# Altium PCB SL1 Xilinx Spartan-IIE PQ208 Rev1.02.PcbDoc (part 1 of 2)
Units mm, origin at the board's own origin, x right, y up, seen from the top; angles counter-clockwise.
Board outline 180.01 x 50.51 mm, 2 copper layers (Top Layer, Bottom Layer), stack 1.646 mm thick; 115 components, 126 nets, 642 pads, 225 vias.
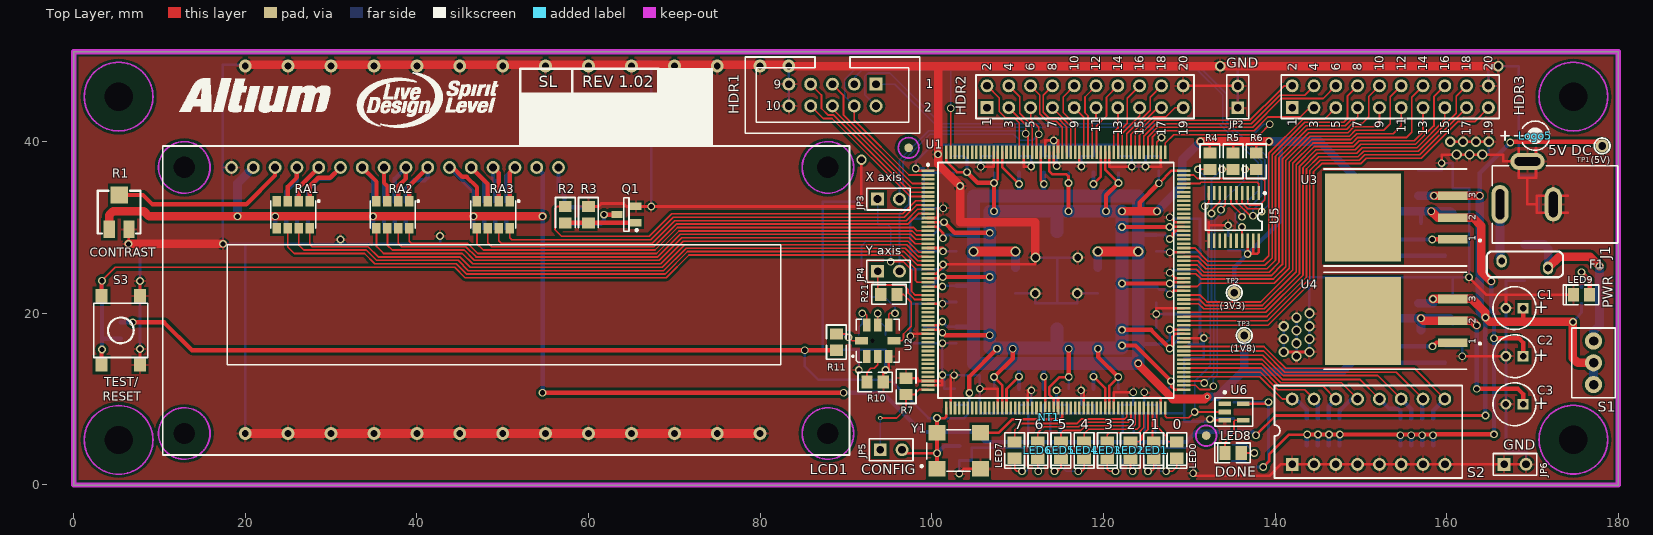
[diagram p0: Top Layer view]
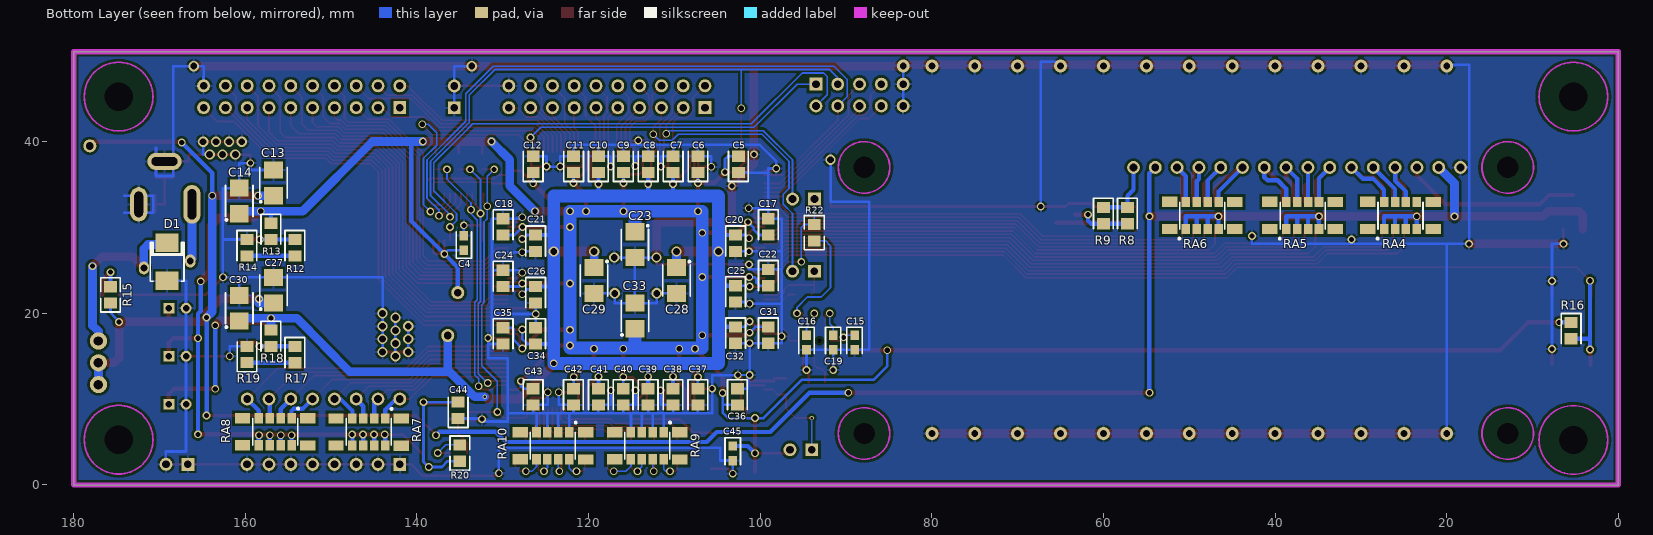
[diagram p1: Bottom Layer view, seen from below]

## Layer stack, top to bottom
Top Solder: solder mask 0.0102, Solder Resist, Dk 3.5
Top Layer: signal copper 0.0356
Dielectric1: core 1.5748, FR-4, Dk 4.8
Bottom Layer: signal copper 0.0356
Bottom Solder: solder mask 0.0102, Solder Resist, Dk 3.5

## Board outline
0,-0.005 cw(c0,0) -0.005,0 -0.005,50.5 cw(c0,50.5) 0,50.505 180,50.505 cw(c180,50.5) 180.005,50.5 180.005,0 cw(c180,0) 180,-0.005

## Design rules (kind name [scope] priority, off if disabled: settings)
Clearance "Clearance_Power Polygon" [inpolygon and innetclass('Power')] p1: gap=0.3 ignorepadtopadclearanceinfootprint=FALSE except(0: Arc-Hole Track-Hole SMDPad-Hole THPad-Hole Via-Hole Fill-Hole Poly-Hole Region-Hole Text-Hole)
Clearance [All] p2: gap=0.2 ignorepadtopadclearanceinfootprint=FALSE except(0: Arc-Hole Track-Hole SMDPad-Hole THPad-Hole Via-Hole Fill-Hole Poly-Hole Region-Hole Text-Hole) // General
ComponentClearance ComponentClearance_D1_F1 [InComponent('D1') vs InComponent('F1')] p1 off: gap=0.03 collisioncheckmode=3 verticalgap=0.254 showdistances=FALSE
ComponentClearance ComponentClearance_JP4_R21 [InComponent('JP4') vs InComponent('R21')] p2 off: gap=0.07 collisioncheckmode=3 verticalgap=0.254 showdistances=FALSE
ComponentClearance ComponentClearance_LCD1_U2 [InComponent('LCD1') vs InComponent('U2')] p3 off: gap=0.09 collisioncheckmode=3 verticalgap=0.254 showdistances=FALSE
ComponentClearance ComponentClearance_U1_U6 [InComponent('U1') vs InComponent('U6')] p4 off: gap=0.1 collisioncheckmode=3 verticalgap=0.254 showdistances=FALSE
ComponentClearance ComponentClearance_S2 [InComponent('S2') vs InComponent('RA7') Or InComponent('RA8')] p5 off: gap=0.1 collisioncheckmode=3 verticalgap=0.254 showdistances=FALSE // Why is such a small clearance necessary?
ComponentClearance ComponentClearance_LCD1_R11 [InComponent('LCD1') vs InComponent('R11')] p6 off: gap=0.16 collisioncheckmode=3 verticalgap=0.254 showdistances=FALSE
ComponentClearance ComponentClearance_J1_Logo5 [InComponent('J1') vs InComponent('Logo5')] p7 off: gap=0.19 collisioncheckmode=3 verticalgap=0.254 showdistances=FALSE
ComponentClearance ComponentClearance_R2_R3 [InComponent('R2') vs InComponent('R3')] p8 off: gap=0.19 collisioncheckmode=3 verticalgap=0.254 showdistances=FALSE
ComponentClearance ComponentClearance_R5 [InComponent('R5') vs InComponent('R4') Or InComponent('R6')] p9 off: gap=0.19 collisioncheckmode=3 verticalgap=0.254 showdistances=FALSE
ComponentClearance ComponentClearance_LEDs [HasFootprint('SMD _LED') vs HasFootprint('SMD _LED')] p10 off: gap=0.19 collisioncheckmode=3 verticalgap=0.254 showdistances=FALSE
ComponentClearance ComponentClearance_R7_R10 [InComponent('R7') vs InComponent('R10')] p11 off: gap=0.24 collisioncheckmode=3 verticalgap=0.254 showdistances=FALSE
ComponentClearance ComponentClearance_U1 [InComponent('U1') vs Not InComponent('NT1') && Not InComponent('LED8')] p12 off: gap=0.254 collisioncheckmode=3 verticalgap=0.254 showdistances=FALSE
ComponentClearance ComponentClearance_General [Not InComponent('U1') vs Not InComponent('U1')] p13 off: gap=0.254 collisioncheckmode=3 verticalgap=0.254 showdistances=FALSE
ComponentClearance ComponentClearance_Default [All] p14: gap=0.127 collisioncheckmode=3 verticalgap=0.254 showdistances=FALSE
FabricationTestPointUsage TestPointUsage [All] p1 off: valid=0 allowmultiple=FALSE
FabricationTestpoint Testpoint [All] p1 off: side=3 testpointundercomponent=TRUE minsize=1.016 maxsize=2.54 preferedsize=1.524 minholesize=0 maxholesize=1.016 preferedholesize=0.813 testpointgrid=0.025 allowsidetop=TRUE allowsidebottom=TRUE usegrid=TRUE gridtolerance=0
HoleSize [All] p1: absolutevalues=TRUE maxlimit=3.5 minlimit=0 maxpercent=80.000 minpercent=20.000
PlaneConnect [All] p1: planeconnectstyle=Relief reliefexpansion=0.3 reliefentries=4 reliefconductorwidth=0.2 reliefairgap=0.2
PolygonConnect PolygonConnect_Power [innetclass('Power')] p1: connectstyle=Relief reliefconductorwidth=0.3 reliefentries=4 polygonreliefangle="90 Angle" airgapwidth=0.254
PolygonConnect [All] p2: connectstyle=Relief reliefconductorwidth=0.2 reliefentries=4 polygonreliefangle="90 Angle" airgapwidth=0.254
RoutingVias RoutingVias_Power [innetclass('Power')] p1: holewidth=0.6 width=0.9 viastyle="Through Hole" minholewidth=0.3 minwidth=0.5 maxholewidth=0.8 maxwidth=1.5
RoutingVias [All] p2: holewidth=0.6 width=0.9 viastyle="Through Hole" minholewidth=0.3 minwidth=0.5 maxholewidth=0.6 maxwidth=0.9
SilkToSolderMaskClearance SilkscreenOverComponentPads [IsPad] p1: minsilkscreentomaskgap=0.254 clearancetoexposedcopper=TRUE
SolderMaskExpansion SolderMaskExpansion_Power_Vias [isvia] p1: expansion=0 istentingtop=FALSE
SolderMaskExpansion [All] p2: expansion=0.1 istentingtop=FALSE
Width Width_Power [innetclass('Power') and not inpolygon] p1: maxlimit=2 minlimit=0.3 preferedwidth=0.3
Width [All] p2: maxlimit=2 minlimit=0.2 preferedwidth=0.2
24 further rules are at their usual default settings.

## Classes and differential pairs
component class U_SL_LCD_SW_LED: LCD1 LED0 LED1 LED2 LED3 LED4 LED5 LED6 LED7 Q1 R1 R2 R3 R8 R9 R16 RA1 RA2 RA3 RA4 RA5 RA6 RA7 RA8 RA9 RA10 S2 S3
component class U_SL_FPGA_Auto_2E: U1
component class U_SL_Config: C4 C44 LED8 R4 R5 R6 R20 U5 U6
component class SL_FPGA_Manual_2E: C1 C2 C3 C5 C6 C7 C8 C9 C10 C11 C12 C13 C14 C17 C18 C20 C21 C22 C23 C24 C25 C26 C27 C28 C29 C30 C31 C32 C33 C34 C35 C36 C37 C38 C39 C40 C41 C42 C43 D1 F1 J1 JP2 JP6 LED9 R12 R13 R14 R15 R17 R18 R19 S1 TP1 TP2 TP3 U3 U4
net class SW[7..0]: SW0 SW1 SW2 SW3 SW4 SW5 SW6 SW7
net class LEDS[7..0]: LEDS0 LEDS1 LEDS2 LEDS3 LEDS4 LEDS5 LEDS6 LEDS7
net class LCD_DB[7..0]: LCD_DB0 LCD_DB1 LCD_DB2 LCD_DB3 LCD_DB4 LCD_DB5 LCD_DB6 LCD_DB7
net class Power: 5V GND VCCINT VCCO

## Components (designator, comment, footprint, x,y, rotation, side; value= is the part's Value field where it differs from the comment)
C1 "100uF 16V" CAPPR2-5X6.8 167.9,20.6 r180 top
C2 "100uF 16V" CAPPR2-5X6.8 167.9,15 r180 top
C3 "100uF 16V" CAPPR2-5X6.8 167.9,9.4 r180 top
C4 "10nF" CC1608-0603 134.525,28.2 r90 bottom
C5 "0.1uF" CC2012-0805 102.55,37.35 r90 bottom
C6 "0.1uF" CC2012-0805 107.25,37.35 r90 bottom
C7 "0.1uF" CC2012-0805 110.15,37.35 r90 bottom
C8 "0.1uF" CC2012-0805 113.05,37.35 r90 bottom
C9 "0.1uF" CC2012-0805 115.95,37.35 r90 bottom
C10 "0.1uF" CC2012-0805 118.85,37.35 r90 bottom
C11 "0.1uF" CC2012-0805 121.75,37.35 r90 bottom
C12 "0.1uF" CC2012-0805 126.45,37.35 r90 bottom
C13 "10uF" MCCT-B 156.7,35.2 r90 bottom
C14 "10uF" MCCT-B 160.7,33.1 r90 bottom
C15 "100nF" CC1608-0603 89,16.6 r270 bottom
C16 "100nF" CC1608-0603 94.6,16.6 r270 bottom
C17 "0.1uF" CC2012-0805 99.05,30.075 r270 bottom
C18 "0.1uF" CC2012-0805 129.95,30.075 r270 bottom
C19 "100nF" CC1608-0603 91.5,16.6 r270 bottom
C20 "0.1uF" CC2012-0805 102.85,28.175 r270 bottom
C21 "0.1uF" CC2012-0805 126.15,28.175 r270 bottom
C22 "0.1uF" CC2012-0805 99.05,24.175 r270 bottom
C23 "10uF" MCCT-B 114.6,28 r270 bottom
C24 "0.1uF" CC2012-0805 129.95,24.075 r270 bottom
C25 "0.1uF" CC2012-0805 102.85,22.275 r270 bottom
C26 "0.1uF" CC2012-0805 126.15,22.175 r270 bottom
C27 "10uF" MCCT-B 156.7,22.7 r90 bottom
C28 "10uF" MCCT-B 109.75,23.825 r270 bottom
C29 "10uF" MCCT-B 119.35,23.825 r270 bottom
C30 "10uF" MCCT-B 160.7,20.6 r90 bottom
C31 "0.1uF" CC2012-0805 99.05,17.475 r270 bottom
C32 "0.1uF" CC2012-0805 102.85,17.475 r270 bottom
C33 "10uF" MCCT-B 114.6,19.7 r90 bottom
C34 "0.1uF" CC2012-0805 126.15,17.375 r270 bottom
C35 "0.1uF" CC2012-0805 129.95,17.375 r270 bottom
C36 "0.1uF" CC2012-0805 102.65,10.275 r270 bottom
C37 "0.1uF" CC2012-0805 107.25,10.275 r270 bottom
C38 "0.1uF" CC2012-0805 110.15,10.275 r270 bottom
C39 "0.1uF" CC2012-0805 113.05,10.275 r270 bottom
C40 "0.1uF" CC2012-0805 115.95,10.275 r270 bottom
C41 "0.1uF" CC2012-0805 118.85,10.275 r270 bottom
C42 "0.1uF" CC2012-0805 121.75,10.275 r270 bottom
C43 "0.1uF" CC2012-0805 126.45,10.275 r270 bottom
C44 "0.1uF" CC2012-0805 135.2,8.7 r90 bottom
C45 "10nF" CC1608-0603 103.2,3.7 r270 bottom
D1 "SM6T6V8A" DO214 169.1,25.999 r90 bottom
F1 "Polyswitch, 1.1A" RUE160_0.2 169.1,25.7 r0 top
HDR1 "Header 5X2" HDR2X5_LP 93.5,46.7 r0 top
HDR2 "Header 10X2" HDR2X10 106.44,43.96 r0 top locked
HDR3 "Header 10X2" HDR2X10 142,43.96 r0 top locked
J1 "KLD-0202-B" KLD-0202 179.9,32.7 r180 top
JP2 "GND" HDR1X2 135.65,43.96 r90 top locked
JP3 "X axis" HDR1X2 93.693,33.31 r0 top
JP4 "Y axis" HDR1X2 93.7,24.9 r0 top
JP5 "CONFIG" HDR1X2 94,4.1 r0 top
JP6 "GND" HDR1X2 166.7,2.4 r0 top
LCD1 "162A" 162A 18.4,37 r0 top locked
LED0 "HSMH-C170" "SMD _LED" 128.55,4.075 r90 top
LED1 "HSMH-C170" "SMD _LED" 125.85,4.075 r90 top
LED2 "HSMH-C170" "SMD _LED" 123.15,4.075 r90 top
LED3 "HSMH-C170" "SMD _LED" 120.45,4.075 r90 top
LED4 "HSMH-C170" "SMD _LED" 117.75,4.075 r90 top
LED5 "HSMH-C170" "SMD _LED" 115.05,4.075 r90 top
LED6 "HSMH-C170" "SMD _LED" 112.35,4.075 r90 top
LED7 "HSMH-C170" "SMD _LED" 109.65,4.075 r90 top
LED8 "HSMH-C170" "SMD _LED" 135.1,3.725 r0 top
LED9 "HSMH-C170" "SMD _LED" 175.7,22.15 r0 top
Logo5 "5V" "5V SYMBOL" 170.3,40.7 r0 top
NT1 "GND" NT 113.686,8.174 r270 top net-tie
Q1 "2N7002" SO-G3 64.4,31.5 r90 top
R1 "20K" POT4MM-2 5.3,31.8 r90 top
R2 "560R" CC2012-0805 57.3,31.5 r270 top
R3 "10K" CC2012-0805 60,31.5 r270 top
R4 "4K7" CR2012-0805 132.4,37.725 r270 top
R5 "4K7" CR2012-0805 135.1,37.725 r270 top
R6 "4K7" CR2012-0805 137.8,37.725 r270 top
R7 "1K" CR2012-0805 97,11.5 r270 top
R8 "68R" CC2012-0805 57.2,31.4 r270 bottom
R9 "68R" CC2012-0805 60,31.4 r270 bottom
R10 "680R" CR2012-0805 93.4,12 r180 top
R11 "0R" CR2012-0805 88.88,16.65 r90 top
R12 "100R" CC2012-0805 154.2,27.65 r270 bottom
R13 "120R" CC2012-0805 157,29.55 r270 bottom
R14 "100R" CC2012-0805 159.8,27.65 r270 bottom
R15 "270R" CR2012-0805 175.7,22.15 r270 bottom
R16 "4K7" CC2012-0805 5.5,18 r270 bottom
R17 "47R" CC2012-0805 154.2,15.2 r270 bottom
R18 "120R" CC2012-0805 157,17.1 r270 bottom
R19 "5R6" CC2012-0805 159.8,15.2 r90 bottom
R20 "270R" CR2012-0805 135,3.725 r270 bottom
R21 "100R" CR2012-0805 95,22.2 r0 top
R22 "100R" CR2012-0805 93.7,29.4 r270 bottom
RA1 "270R" MNR34 25.6,31.5 r270 top
RA2 "270R" MNR34 37.2,31.5 r270 top
RA3 "270R" MNR34 48.9,31.5 r270 top
RA4 "4K7" MNR34T 25.4,31.4 r270 bottom
RA5 "4K7" MNR34T 36.8,31.4 r270 bottom
RA6 "4K7" MNR34T 48.5,31.4 r270 bottom
RA7 "4K7" MNR34T 145.605,6.174 r90 bottom
RA8 "4K7" MNR34T 156.5,6.2 r90 bottom
RA9 "270R" MNR34T 113.15,4.575 r90 bottom
RA10 "270R" MNR34T 124.15,4.575 r90 bottom
S1 "TL36WW050" PCB_SWITCH 177.105,11.689 r90 top
S2 "A6ER-8104" DIP-16-KEY 142,2.4 r0 top
S3 "DTSM-61-NR" B3FS_SWITCH 5.5,18 r270 top
TP1 "(5V)" TP 178.1,39.5 r0 top
TP2 "(3V3)" TP 135.233,22.4 r0 top
TP3 "(1V8)" TP 136.4,17.4 r0 top
U1 "XC2S300E-6PQ208C" PQ208 114.45,23.875 r0 top locked
U2 "ADXL202E" E-8 93.7,16.8 r90 top
U3 "LM1084IS-ADJ" TO-263 160.7,28.62 r90 top
U4 "LM1084IS-ADJ" TO-263 160.7,16.6 r90 top
U5 "XCF02SVO20C" VO20 135.175,31.225 r180 top
U6 "SN74LVC1G04DBV" SO-G5/P.95 135.2,8.5 r270 top
Y1 "25MHz" QSMO_4200 100.6,1.5 r0 top

## Footprints (in the part's own frame and the unit in brackets; to place one, negate y for a bottom-side part, rotate by r counter-clockwise, add the part's x,y. Pads: shape width x height; smd on the part's side, far side on the other; paste and mask are expansions set on the pad)
"5V SYMBOL" [mm]
  silkscreen extent -4.01,-1.71 1.7,1.71
162A [mm]
  round 1.5 hole 0.9: 1(0,0) 2(2.54,0) 3(5.08,0) 4(7.62,0) 5(10.16,0) 6(12.7,0) 7(15.24,0) 8(17.78,0) 9(20.32,0) 10(22.86,0) 11(25.4,0) 12(27.94,0) 13(30.48,0) 14(33.02,0) 15(35.56,0) 16(38.1,0)
  round 2.3 hole 2.5 unplated: M1(-5.5,0) M2(69.5,0) M3(-5.5,-31) M4(69.5,-31)
  Keep-Out Layer circle w0.2: c-5.5,0 r3
  Keep-Out Layer circle w0.2: c-5.5,-31 r3
  Keep-Out Layer circle w0.2: c69.5,-31 r3
  Keep-Out Layer circle w0.2: c69.5,0 r3
  silkscreen extent -8,-33.5 72,2.5, body extent -8.01,-33.5 72,2.5, height 10.16
B3FS_SWITCH [mm]
  rect 1.6x1.4 smd: 1(3.998,-2.244) 2(-4.012,-2.244) 3(3.998,2.246) 4(-4.012,2.246)
  silkscreen extent -3.17,-3.15 3.14,3.16, body extent -4.57,-3.15 4.57,3.16, height 4.57
CAPPR2-5X6.8 [mm]
  rect 1.25x1.25 hole 0.75: 1(-0.994,-0.009)
  round 1.25 hole 0.75: 2(1.006,-0.009)
  silkscreen extent -2.49,-2.51 2.5,2.49, body extent -2.49,-2.51 2.51,2.49, height 10.16
CC1608-0603 [mm]
  rect 1.1x1 smd: 1(-0.843,0.001) 2(0.857,0.001)
  silkscreen extent -1.79,-0.9 1.31,0.9, body extent -1.46,-0.57 1.46,0.57, height 0.76
CC2012-0805 [mm]
  rect 1.3x1.5 smd: 1(-0.945,-0.007) 2(0.955,-0.007)
  silkscreen extent -1.99,-1.16 1.51,1.14, body extent -1.52,-0.7 1.52,0.7, height 0.76
CR2012-0805 [mm]
  rect 1.3x1.5 smd: 1(-0.946,0) 2(0.954,0)
  silkscreen extent -2,-1.15 2,1.15, body extent -1.52,-0.7 1.52,0.7, height 0.76
DIP-16-KEY [mm]
  rect 1.5x1.5 hole 0.9: 1(-0.011,0.001)
  round 1.5 hole 0.9: 2(2.529,0.001) 3(5.069,0.001) 4(7.609,0.001) 5(10.149,0.001) 6(12.689,0.001) 7(15.229,0.001) 8(17.789,0.001) 9(17.769,7.621) 10(15.229,7.621) 11(12.689,7.621) 12(10.149,7.621) 13(7.609,7.621) 14(5.069,7.621) 15(2.529,7.621) 16(-0.011,7.621)
  silkscreen extent -2.06,-1.59 19.82,9.2, body extent -2.03,-1.52 19.81,9.14, height 7.11
DO214 [mm]
  rect 2.159x2.7 smd: 1(-2.21,0.005) 2(2.235,0.005)
  silkscreen extent -2.27,-1.96 2.3,1.97, body extent -3.17,-1.27 3.17,1.27, height 1.27
E-8 [mil]
  round 15 hole 20 unplated: 0(-0.02,23.98)
  rect 60x35 smd: 1(-72.85,49.98) 2(-72.85,-0.02) 3(-72.85,-50.02) 5(72.82,-50.02) 6(72.82,-0.02) 7(72.82,49.98)
  rect 35x60 smd: 4(-0.02,-74.82) 8(-0.02,74.79)
  silkscreen extent -98,-98 99,118, body extent -95,-95 95,95, height 80
HDR1X2 [mm]
  rect 1.5x1.5 hole 0.9: 1(-0.011,0.007)
  round 1.5 hole 0.9: 2(2.529,0.007)
  silkscreen extent -1.28,-1.26 3.8,1.28, body extent -1.27,-1.27 3.81,1.27, height 10
HDR2X5_LP [mm]
  rect 1.5x1.5 hole 0.9: 1(0.003,0.004)
  round 1.5 hole 0.9: 2(0.003,-2.536) 3(-2.537,0.004) 4(-2.537,-2.536) 5(-5.077,0.004) 6(-5.077,-2.536) 7(-7.617,0.004) 8(-7.617,-2.536) 9(-10.157,0.004) 10(-10.157,-2.536)
  silkscreen extent -15.24,-5.71 5.08,3.18, body extent -15.24,-5.71 5.08,3.18, height 10
HDR2X10 [mm]
  rect 1.5x1.5 hole 0.9: 1(-0.011,0.007)
  round 1.5 hole 0.9: 2(-0.011,2.547) 3(2.529,0.007) 4(2.529,2.547) 5(5.069,0.007) 6(5.069,2.547) 7(7.609,0.007) 8(7.609,2.547) 9(10.149,0.007) 10(10.149,2.547) 11(12.689,0.007) 12(12.689,2.547) 13(15.229,0.007) 14(15.229,2.547) 15(17.769,0.007) 16(17.769,2.547) 17(20.309,0.007) 18(20.309,2.547) 19(22.849,0.007) 20(22.849,2.547)
  silkscreen extent -1.28,-1.26 24.12,3.82, body extent -1.27,-1.27 24.13,3.81, height 10
KLD-0202 [mm]
  oval 2x4.5 hole 1 slot 3.5 at 90 deg: 1(13.692,-0.001)
  oval 2x4 hole 1 slot 3 at 90 deg: 2(7.492,-0.001)
  oval 4x2 hole 1 slot 3 at 0 deg: 3(10.492,-5.001)
  silkscreen extent -0.01,-4.5 14.59,4.5, body extent 0,-4.44 14.6,4.45, height 7.62
MCCT-B [mm]
  rect 2x2.2 smd: 1(-1.505,-0.002) 2(1.495,-0.002)
  silkscreen extent -2.3,-1.6 1.8,1.6, body extent -2.29,-0.89 2.29,0.89, height 1.27
MNR34 [mm]
  rect 1.2x1 smd: 1(-1.578,1.898) 2(-1.578,0.628) 3(-1.578,-0.642) 4(-1.578,-1.912) 5(1.572,-1.912) 6(1.572,-0.642) 7(1.572,0.628) 8(1.572,1.898)
  silkscreen extent -1.68,-2.62 1.55,3.06, body extent -2.03,-2.29 2.03,2.29, height 1.27
MNR34T [mm]
  rect 1.2x1 smd: 1(1.575,-1.896) 2(1.575,-0.626) 3(1.575,0.644) 4(1.575,1.914) 5(-1.575,1.914) 6(-1.575,0.644) 7(-1.575,-0.626) 8(-1.575,-1.896)
  rect 1.2x1.8 smd: STP(-1.6,-3.801) STP(-1.575,3.819) STP(1.575,-3.801) STP(1.575,3.819)
  silkscreen extent -1.55,-2.76 2.79,2.62, body extent -1.65,-2.71 1.68,2.72, height 2
NT [mm]
  rect 0.2x0.2 smd: 1(0.01,0.011) 2(0.51,0.011)
  Top Layer lines w0.3: 0.51,0.011 0.01,0.011
PCB_SWITCH [mm]
  round 2 hole 1.1: 1(0.011,0.005) 2(2.551,0.005) 3(5.091,0.005)
  silkscreen extent -1.54,-2.53 6.59,2.55, body extent -1.52,-2.54 6.6,2.54, height 15
POT4MM-2 [mm]
  rect 2x1.3 smd: CCW(-2.008,-1.162) CW(-2.008,1.138)
  rect 2x2 smd: W(1.992,-0.012)
  silkscreen extent -2.51,-2.51 2.49,2.49, body extent -2.92,-2.41 2.92,2.41, height 3.05
PQ208 [mm]
  rect 1.55x0.3 smd: 1(-14.902,12.738) 2(-14.902,12.238) 3(-14.902,11.738) 4(-14.902,11.238) 5(-14.902,10.738) 6(-14.902,10.238) 7(-14.902,9.738) 8(-14.902,9.238) 9(-14.902,8.738) 10(-14.902,8.238) 11(-14.902,7.738) 12(-14.902,7.238) 13(-14.902,6.738) 14(-14.902,6.238) 15(-14.902,5.738) 16(-14.902,5.238) 17(-14.902,4.738) 18(-14.902,4.238) 19(-14.902,3.738) 20(-14.902,3.238) 21(-14.902,2.738) 22(-14.902,2.238) 23(-14.902,1.738) 24(-14.902,1.238) 25(-14.902,0.738) 26(-14.902,0.238) 27(-14.902,-0.262) 28(-14.902,-0.762) 29(-14.902,-1.262) 30(-14.902,-1.762) 31(-14.902,-2.262) 32(-14.902,-2.762) 33(-14.902,-3.262) 34(-14.902,-3.762) 35(-14.902,-4.262) 36(-14.902,-4.762) 37(-14.902,-5.262) 38(-14.902,-5.762) 39(-14.902,-6.262) 40(-14.902,-6.762) 41(-14.902,-7.262) 42(-14.902,-7.762) 43(-14.902,-8.262) 44(-14.902,-8.762) 45(-14.902,-9.262) 46(-14.902,-9.762) 47(-14.902,-10.262) 48(-14.902,-10.762) 49(-14.902,-11.262) 50(-14.902,-11.762) 51(-14.902,-12.262) 52(-14.902,-12.762) 105(14.898,-12.762) 106(14.898,-12.262) 107(14.898,-11.762) 108(14.898,-11.262) 109(14.898,-10.762) 110(14.898,-10.262) 111(14.898,-9.762) 112(14.898,-9.262) 113(14.898,-8.762) 114(14.898,-8.262) 115(14.898,-7.762) 116(14.898,-7.262) 117(14.898,-6.762) 118(14.898,-6.262) 119(14.898,-5.762) 120(14.898,-5.262) 121(14.898,-4.762) 122(14.898,-4.262) 123(14.898,-3.762) 124(14.898,-3.262) 125(14.898,-2.762) 126(14.898,-2.262) 127(14.898,-1.762) 128(14.898,-1.262) 129(14.898,-0.762) 130(14.898,-0.262) 131(14.898,0.238) 132(14.898,0.738) 133(14.898,1.238) 134(14.898,1.738) 135(14.898,2.238) 136(14.898,2.738) 137(14.898,3.238) 138(14.898,3.738) 139(14.898,4.238) 140(14.898,4.738) 141(14.898,5.238) 142(14.898,5.738) 143(14.898,6.238) 144(14.898,6.738) 145(14.898,7.238) 146(14.898,7.738) 147(14.898,8.238) 148(14.898,8.738) 149(14.898,9.238) 150(14.898,9.738) 151(14.898,10.238) 152(14.898,10.738) 153(14.898,11.238) 154(14.898,11.738) 155(14.898,12.238) 156(14.898,12.738)
  rect 0.3x1.55 smd: 53(-12.752,-14.912) 54(-12.252,-14.912) 55(-11.752,-14.912) 56(-11.252,-14.912) 57(-10.752,-14.912) 58(-10.252,-14.912) 59(-9.752,-14.912) 60(-9.252,-14.912) 61(-8.752,-14.912) 62(-8.252,-14.912) 63(-7.752,-14.912) 64(-7.252,-14.912) 65(-6.752,-14.912) 66(-6.252,-14.912) 67(-5.752,-14.912) 68(-5.252,-14.912) 69(-4.752,-14.912) 70(-4.252,-14.912) 71(-3.752,-14.912) 72(-3.252,-14.912) 73(-2.752,-14.912) 74(-2.252,-14.912) 75(-1.752,-14.912) 76(-1.252,-14.912) 77(-0.752,-14.912) 78(-0.252,-14.912) 79(0.248,-14.912) 80(0.748,-14.912) 81(1.248,-14.912) 82(1.748,-14.912) 83(2.248,-14.912) 84(2.748,-14.912) 85(3.248,-14.912) 86(3.748,-14.912) 87(4.248,-14.912) 88(4.748,-14.912) 89(5.248,-14.912) 90(5.748,-14.912) 91(6.248,-14.912) 92(6.748,-14.912) 93(7.248,-14.912) 94(7.748,-14.912) 95(8.248,-14.912) 96(8.748,-14.912) 97(9.248,-14.912) 98(9.748,-14.912) 99(10.248,-14.912) 100(10.748,-14.912) 101(11.248,-14.912) 102(11.748,-14.912) 103(12.248,-14.912) 104(12.748,-14.912) 157(12.748,14.888) 158(12.248,14.888) 159(11.748,14.888) 160(11.248,14.888) 161(10.748,14.888) 162(10.248,14.888) 163(9.748,14.888) 164(9.248,14.888) 165(8.748,14.888) 166(8.248,14.888) 167(7.748,14.888) 168(7.248,14.888) 169(6.748,14.888) 170(6.248,14.888) 171(5.748,14.888) 172(5.248,14.888) 173(4.748,14.888) 174(4.248,14.888) 175(3.748,14.888) 176(3.248,14.888) 177(2.748,14.888) 178(2.248,14.888) 179(1.748,14.888) 180(1.248,14.888) 181(0.748,14.888) 182(0.248,14.888) 183(-0.252,14.888) 184(-0.752,14.888) 185(-1.252,14.888) 186(-1.752,14.888) 187(-2.252,14.888) 188(-2.752,14.888) 189(-3.252,14.888) 190(-3.752,14.888) 191(-4.252,14.888) 192(-4.752,14.888) 193(-5.252,14.888) 194(-5.752,14.888) 195(-6.252,14.888) 196(-6.752,14.888) 197(-7.252,14.888) 198(-7.752,14.888) 199(-8.252,14.888) 200(-8.752,14.888) 201(-9.252,14.888) 202(-9.752,14.888) 203(-10.252,14.888) 204(-10.752,14.888) 205(-11.252,14.888) 206(-11.752,14.888) 207(-12.252,14.888) 208(-12.752,14.888)
  round 1 smd: FID1(-17.152,15.413) FID2(17.523,-18.112)
  Top Layer keep-out circle w0.2: c-17.152,15.413 r1.2
  Top Layer keep-out circle w0.2: c17.523,-18.137 r1.2
  silkscreen extent -15.03,-13.74 13.72,13.71, body extent -15.35,-15.36 15.35,15.34, height 2.5
QSMO_4200 [mm]
  rect 2x1.8 smd: 1(-0.009,0.39) 2(5.071,0.39) 3(5.071,4.59) 4(-0.009,4.59)
  silkscreen extent -1.91,0.09 6.21,4.94, body extent -1.14,-0.32 6.1,5.3, height 1.5
RUE160_0.2 [mm]
  oval 1.2x1.5 hole 0.8: 1(-2.7,0.4) 2(2.7,-0.4)
  silkscreen extent -4.45,-1.5 4.45,1.5, body extent -4.45,-1.5 4.45,1.5, height 12
"SMD _LED" [mm]
  rect 1.3x1.6 smd: 1(0.948,0.006) 2(-0.952,0.006)
  silkscreen extent -2.13,-1.14 2,1.16, body extent -1.52,-0.64 1.52,0.64, height 1.27
SO-G3 [mm]
  rect 0.85x1.3 smd: 1(-0.939,-1.107) 2(0.961,-1.107) 3(0.011,1.093)
  silkscreen extent -1.94,-1.33 1.96,0.29, body extent -1.65,-1.52 1.65,1.51, height 2.54
SO-G5/P.95 [mm]
  rect 0.55x1.45 smd: 1(-0.954,-1.07) 2(-0.004,-1.07) 3(0.946,-1.07) 4(0.946,1.08) 5(-0.954,1.08)
  silkscreen extent -2.43,-2.19 1.65,2.21, body extent -1.27,-1.78 1.27,1.78, height 0.89
TO-263 [mm]
  rect 1x3.4 smd: 1(-0.006,0.009) 2(2.534,0.009) 3(5.074,0.009)
  rect 10.25x8.9 smd: 4(2.534,10.459)
  silkscreen extent -3.11,-3.29 8.19,15.01, body extent -2.29,-1.14 7.37,14.35, height 2.03
TP [mil]
  round 60 hole 35.43: 1(0.14,0.45)
  silkscreen extent -36,-36 36,36, body extent -36,-36 36,36
VO20 [mm]
  rect 0.3x1.65 smd: 1(-2.929,-2.778) 2(-2.279,-2.778) 3(-1.629,-2.778) 4(-0.979,-2.778) 5(-0.329,-2.778) 6(0.321,-2.778) 7(0.971,-2.778) 8(1.621,-2.778) 9(2.271,-2.778) 10(2.921,-2.778) 11(2.921,2.772) 12(2.271,2.772) 13(1.621,2.772) 14(0.971,2.772) 15(0.321,2.772) 16(-0.329,2.772) 17(-0.979,2.772) 18(-1.629,2.772) 19(-2.279,2.772) 20(-2.929,2.772)
  silkscreen extent -3.75,-2.9 3.3,1.55, body extent -3.3,-3.56 3.3,3.55, height 1.52

## Part data
C1 C2 C3: library part CAP_POLAR_1, "Polar Capacitor"
C4 C5 C6 C7 C8 C9 C10 C11 C12 C15 C16 C17 C18 C19 C20 C21 C22 C24 C25 C26 C31 C32 C34 C35 C36 C37 C38 C39 C40 C41 C42 C43 C44 C45: library part CAP, "Capacitor"
  C4 C45: AEMS Code=2100341
  C5 C6 C7 C8 C9 C10 C11 C12 C17 C18 C20 C21 C22 C24 C25 C26 C31 C32 C34 C35 C36 C37 C38 C39 C40 C41 C42 C43 C44: Supplier=FARNELL, Supplier Code=317-287
  C15 C16 C19: AEMS Code=2101550
C13 C14 C23 C27 C28 C29 C30 C33: library part CAP_POLAR, "Polar Capacitor", Capacitor Type=Tant, AEMS Code=2100110, Supplier=FARNELL, Supplier Code=967-117
D1: library part BZG03C13, "Zener Diode, 6.2V, 5W", Manufacturer=Microsemi, Revision=31-Oct-2003
F1: library part "Fuse 2", "Polyswitch 1.1A, Raychem RUE110", Revision="July-2002: Re-released for DXP Platform.", Supplier=FARNELL, Supplier Code=608-907
HDR1: "Header, 5-Pin, Dual row", Revision="17-Jul-2002: Re-released for DXP Platform."
HDR2 HDR3: "Header, 10-Pin, Dual row", Revision="July-2002: Re-released for DXP Platform."
J1: "Low Voltage Power Supply Connector", Manufacturer=Kycon, AEMS Code=3510211
JP2 JP3 JP4 JP5 JP6: library part "Jumper, 2-Pin", "Jumper, 2-Pin"
LCD1: "16 char * 2 line LCD character display with b/light"
LED0 LED1 LED2 LED3 LED4 LED5 LED6 LED7 LED8 LED9: library part HSMX-C670, "Typical RED GaAs SMD LED Agilent make", AEMS Code=2610081, Revision="July-2002: Re-released for DXP Platform."
NT1: library part "Jumper, 2-Pin_1", "Jumper, 2-Pin"
Q1: "N Channel Mosfet"
R1: library part "RPot SM", "Square Trimming Potentiometer", AEMS Code=1400226
R2 R3 R4 R5 R6 R7 R8 R9 R11 R12 R13 R14 R15 R16 R17 R18 R19 R20: library part RES, "Resistor"
  R2: AEMS Code=1200723
  R3: AEMS Code=1200006JT
  R4 R5 R6 R16: AEMS Code=1200226
  R7: AEMS Code=1200008JN
  R8 R9: AEMS Code=1200821
  R11: AEMS Code=1200075
  R12 R14: AEMS Code=1200012JT
  R13 R18: AEMS Code=1200781
  R15 R20: AEMS Code=1200430
  R17: AEMS Code="CHANGED VALUE"
  R19: AEMS Code=1200069
R10 R21 R22: library part Res1, "Resistor", Revision="July-2002: Re-released for DXP Platform."
  R10: AEMS Code="CHANGED VALUE"
  R21 R22: AEMS Code=1200012JT
RA1 RA2 RA3 RA4 RA5 RA6 RA7 RA8 RA9 RA10: library part MNR34, "3216x4 Resistor Array"
  RA1 RA2 RA3 RA9 RA10: AEMS Code=1310010
  RA4 RA5 RA6 RA7 RA8: AEMS Code=1300330
S1: library part PCB_MOUNT_SWITCH, "SPDT Subminiature Toggle Switch", Supplier=FARNELL, Supplier Code=150-559
S2: "DIP Switch Side actuator long liver Piano Key", Revision="July-2002: Re-released for DXP Platform."
S3: library part B3FS, "SPNA SMD Keyboard Switch"
TP1 TP2 TP3: library part TestPin
U1: "Spartan-IIE 1.8V FPGA, 208-Pin PQFP, Standard Performance, Commercial Grade", PackageDocument="ver1.1, Oct-2002", Code_JEDEC=MS-029-FA-1, ComponentLink1Description="Manufacturer Link", ComponentLink1URL=http://www.xilinx.com/xlnx/xil_prodcat_landingpage.jsp?title=Spartan-IIE, DatasheetDocument=09-Jul-2003, LatestRevisionDate=17-Sep-2003, LatestRevisionNote="Pin names updated to match datasheet, ver2.1.", PackageReference=PQ208, Published=19-Jul-2002, Publisher="Altium Limited"
U2: "Accelerometer with Digital Output"
U3 U4: "5A Low Dropout Possitive Regulators"
U5: "XCF00S Series, Platform Flash In-System Programmable Configuration 3.3V PROM, 20-Pin TSOP, 2-Megabit, Commercial Grade", PackageDocument="ver1.0, May-2003", AEMS Code="CHANGED VALUE", Code_JEDEC=MO-153-AC, DatasheetDocument="ver2.3, May-2004", PackageReference=VO20
U6: library part SN74AHC1G04DBVR, Manufacturer=TI
Y1: library part QSMO_4200, "Surface Mount Crystal Oscillator"

## Free pads (board coordinates)
  round 0.9 hole 0.6 mask+0.1: 0(101.225,16.525)
  round 3 hole 3.3 unplated: M3(5.25,5.25) M3(5.25,45.25) M3(174.75,45.25) M3(174.75,5.275)

## Via types
v1: diameter 0.9, hole 0.6, Top Layer to Bottom Layer, tented both sides, 166 vias
v2: diameter 1.5, hole 0.8, Top Layer to Bottom Layer, tented both sides, 27 vias
v3: diameter 1.2, hole 0.8, Top Layer to Bottom Layer, 18 vias
v4: diameter 1.2, hole 0.8, Top Layer to Bottom Layer, tented both sides, 11 vias
v5: diameter 0.5, hole 0.3, Top Layer to Bottom Layer, tented both sides, 2 vias
v6: diameter 0.9, hole 0.6, Top Layer to Bottom Layer, 1 vias

## Nets (pads, with @x,y where several pads share a name; then routed paths per layer and width w, separated by ;. In a path a pad name is that pad's centre, name@x,y a point inside that pad or via, vN(x,y) a via of type N, cw(c..) or ccw(c..) an arc to the next point about the centre after c; other vN are vias at no path point)
5V: C1.1 C13.1 C27.1 LCD1.2 LCD1.15 R1.CW R15.2 RA4.1 RA4.2 RA4.3 RA4.4 RA5.1 RA5.2 RA5.3 RA5.4 RA6.1 RA6.2 RA6.3 RA6.4 S1.1 S1.2 TP1.1 U3.3 U4.3 | length 313.8
  Top Layer w0.3: v1(137.775,5.8) 140.075,8.1 v1(164.5,8.1)
  Top Layer w0.5: v1(54.65,10.75) v1(89.725,10.75) ; v1(167.4,39.9) 167.5,40 177.8,40 TP1.1@178.3,39.5 ; 168.9,19 C1.1@168.9,20.6
  Top Layer w1: R1.CW@4.15,29.8 4.15,31.45 4.6,31.9 8.2,31.9 8.8,31.3 v1(54.65,31.3) ; v1(158.4,21.675) 162.9,21.7 164.5,20.1 v1(164.5,19.525) 165.025,19 v1(174.7,19) 174.7,14.8 175.26,14.24 S1.2@177.1,14.24 ; v1(158.5,33.7) v1(163.85,33.7)
  Bottom Layer w0.3: v1(174.7,19) 175.7,20.1 R15.2@175.7,21.2
  Bottom Layer w0.5: RA4.4@23.495,29.825 v1(23.5,31.3) 27.31,31.3 ; RA4.3@24.765,29.825 24.765,31.295 ; RA4.2@26.035,29.825 26.035,31.295 ; RA4.1@27.305,29.825 27.305,31.295 ; RA5.4@34.895,29.825 v1(34.9,31.3) 38.71,31.3 ; RA5.3@36.165,29.825 36.165,31.295 ; RA5.2@37.435,29.825 37.435,31.295 ; RA5.1@38.705,29.825 38.705,31.295 ; RA6.4@46.595,29.825 v1(46.6,31.3) 50.41,31.3 ; RA6.3@47.865,29.825 47.865,31.295 ; RA6.2@49.135,29.825 49.135,31.295 ; RA6.1@50.405,29.825 50.405,31.295 ; LCD1.15@53.96,37 54.65,36.31 v1(54.65,10.75) ; v1(89.725,10.75) 94.25,10.75 98.8,6.2 105.05,6.175 106.225,5 129.6,5 130.8,6.2 137.375,6.2 v1(137.775,5.8) ; v1(163.85,33.7) 163.85,36.35 v1(167.4,39.9) ; v1(164.5,8.1) v1(164.5,19.525)
  Bottom Layer w1: v1(19.1,31.3) 19.1,35.16 LCD1.2@20.94,37 ; C27.1@156.7,21.2 158.4,21.2 v1(158.4,21.675) ; C13.1@156.7,33.7 v1(158.5,33.7) ; v1(163.85,33.7) 163.85,20.175 v1(164.5,19.525) ; S1.1@177.1,11.7 S1.2@177.1,14.24
CCLK: U1.155 U5.3 | length 15.5
  Top Layer w0.2: U1.155@129.35,36.125 130.525,36.125 130.95,35.7 138.55,35.7 138.8,35.45 138.8,33.2 138.225,32.625 136.975,32.625 136.8,32.8 U5.3@136.8,34
CLK_BRD: NT1.2 U1.80 Y1.3 | length 11.3
  Top Layer w0.3: Y1.3@105.68,6.1 107.8,6.1 109.35,7.65 114.95,7.65 115.198,7.898 U1.80@115.198,8.963
CLK_BRD_1: NT1.1 U1.77
DIN: U1.153 U5.1 | length 10
  Top Layer w0.2: U1.153@129.35,35.125 131.25,35.125 131.4,35.275 137.925,35.275 138.1,35.1 U5.1@138.1,34
DONE: R4.2 U1.104 U5.10 U6.2 | length 41
  Top Layer w0.2: U1.104@127.2,8.975 127.2,8 127.375,7.825 129.95,7.825 v1(130.625,8.5) U6.2@134.125,8.5 ; v1(131,36.775) R4.2@132.4,36.775 ; v1(131.8,32.475) 132.25,32.925 U5.10@132.25,34
  Bottom Layer w0.2: v1(130.625,8.5) 130.625,12.075 132.45,13.9 132.45,20.966 132.175,21.241 132.175,30.639 131.8,31.014 131.8,35.975 v1(131,36.775)
GND: C1.2 C2.2 C3.2 C4.2 C5.1 C6.2 C7.2 C8.2 C9.2 C10.2 C11.2 C12.2 C13.2 C14.2 C15.2 C16.2 C17.1 C18.1 C19.2 C20.2 C21.2 C22.1 C23.2 C24.1 C25.2 C26.2 C27.2 C28.2 C29.2 C30.2 C31.2 C32.2 C33.2 C34.1 C35.2 C36.1 C37.2 C38.2 C39.2 C40.2 C41.2 C42.2 C43.2 C44.1 C45.2 D1.1 HDR1.9 HDR1.10 HDR2.20 HDR3.20 J1.2 J1.3 JP2.1 JP2.2 JP6.1 JP6.2 LCD1.1 LED9.2 pad.0 Q1.2 R1.CCW R3.1 R7.1 R10.1 R14.1 R19.2 RA9.1 RA9.2 RA9.3 RA9.4 RA10.1 RA10.2 RA10.3 RA10.4 S2.1 S2.2 S2.3 S2.4 S2.5 S2.6 S2.7 S2.8 S3.3 S3.4 U1.1 U1.12 U1.19 U1.25 U1.32 U1.39 U1.50 U1.51 U1.54 U1.65 U1.72 U1.79 U1.85 U1.92 U1.103 U1.117 U1.124 U1.131 U1.137 U1.144 U1.158 U1.170 U1.177 U1.182 U1.183 U1.185 U1.190 U1.197 U2.3 U5.11 U6.3 Y1.2 | length 1072.1
  Top Layer w0.3: v1(6.4,28.1) 6.45,28.15 R1.CCW@6.45,29.8 ; S3.3@7.74,13.99 v1(7.74,15.84) ; S3.4@7.74,22 v1(7.74,23.76) ; R3.1@60,32.45 61.15,32.45 61.5,32.8 64.075,32.8 64.425,32.45 65.5,32.45 v1(67.3,32.45) 91.8,32.45 v4(91.8,37.9) ; R10.1@94.35,12 94.35,13.4 94.97,13.4 U2.3@94.97,14.95 ; R7.1@96.989,12.455 98.375,12.455 98.375,12.113 101.225,12.113 ; v1(97.5,17.325) 97.5,17.613 U1.39@99.548,17.613 ; v1(98.125,36.875) 98.125,36.625 U1.1@99.55,36.625 ; U1.32@99.548,21.113 v1@101.225,21.113 ; U1.25@99.548,24.613 100.487,24.613 101.3,25.426 v1(101.3,25.7) 112.075,25.7 v4(112.075,26.5) ; U1.19@99.548,27.613 101.3,27.613 v1(101.3,27.225) ; U1.12@99.548,31.113 100.7,31.113 100.7,32.25 v1(101.325,32.25) ; U1.51@99.55,11.625 101.225,11.625 v1(101.225,12.825) ; U1.54@102.198,9.022 102.198,12.8 v1(102.6,12.8) ; v1(103.2,1.325) 103.775,1.9 Y1.2@105.68,1.9 ; v1(105.6,11.225) 107.698,11.225 U1.65@107.698,8.963 ; v1(105.7,37.075) 107.198,37.075 U1.197@107.198,38.763 ; U1.190@110.698,38.763 110.698,37.1 v1(111.575,37.1) ; U1.72@111.198,8.963 111.198,11.025 v1(111.6,11.025) ; U1.185@113.198,38.763 113.198,40.15 ; 113.2,40.15 114.7,40.15 ; U1.183@114.198,38.763 114.198,37.173 v1(114.55,37.173) ; v1(114.525,11.025) v1@114.7,11.025 ; U1.79@114.698,8.963 114.698,10.098 ; U1.182@114.698,38.763 114.698,40.15 ; v1@117.198,37.1 U1.177@117.198,38.763 ; v1(117.4,11.025) v1@117.7,11.025 ; U1.85@117.698,8.963 v1@117.698,11.025 ; U1.170@120.698,38.763 120.698,37.1 v1(123.3,37.1) ; U1.92@121.198,8.963 121.198,10.8 v1(123.475,10.8) ; v1(124.75,10.8) 124.75,10.15 126.698,10.15 U1.103@126.698,8.963 ; v1(124.9,37.1) 126.7,37.1 ; v1(126.15,19.925) 126.15,20.613 U1.124@129.348,20.613 ; 126.698,37.1 U1.158@126.698,38.763 ; v1(127.725,24.725) 128.337,24.113 U1.131@129.348,24.113 ; v6(127.725,27.113) U1.137@129.348,27.113 ; v1(127.725,31.2) 128.312,30.613 U1.144@129.348,30.613 ; HDR2.20@129.3,46.5 JP2.2@135.65,46.5 ; U1.117@129.348,17.113 v1@131.7,17.113 ; v1(130.45,1.375) 130.7,1.075 139.325,1.075 140.65,2.4 JP6.2@169.24,2.4 ; U5.11@132.25,28.45 132.25,30.625 ; 132.25,30.25 v1(134.525,30.25) ; v1(132.4,7.675) 132.4,7.55 U6.3@134.125,7.55 ; v3(141,15.5) v3(144,15.5) ; v3(142.5,15) v3@142.5,15.5 ; v1(159.4,37.5) 159.4,38.5 166.575,38.5 166.575,37.7 168.4,37.7 J1.3@168.4,37.5 ; v3(160.4,40) v3(164.9,40) ; v1(161.8,15) C2.2@166.9,15 ; v1(162.6,24.2) 164.65,22.15 174.75,22.15 172.45,22.15 ; C1.2@166.9,21 166.9,22.15 ; 168.4,39.255 168.4,35.8 170.4,35.8 170.4,39.255 ; 169.4,35.8 169.4,32.725 170.5,32.725 ; 174.1,31.7 170.5,31.7 170.5,33.7 174.1,33.7
  Top Layer w1: v1(6.4,28.1) v1(17.4,28.1) ; v2(20,6) v2(80,6) ; v2@20,48.95 v2@83.325,48.95 ; v2(83.325,48.8) v4(166,48.8) ; 100.725,48.805 100.725,37.4 v1(103.3,34.825) 103.3,30.6 112.075,30.6 v4(112.075,26.5)
  Bottom Layer w0.3: v1(6.4,28.1) 7.74,28.1 v1(7.74,15.84) ; 17.4,37 LCD1.1@18.4,37 ; v2(20,6) 20,28.1 ; v2@20,48.95 17.4,48.95 v1(17.4,28.1) 42.7,28.1 v1(42.7,29) ; 31.1,28.1 v1(31.1,28.6) ; v2@65,49.3 67.3,49.3 v1(67.3,32.45) ; HDR1.9@83.325,46.715 v2@83.325,48.95 ; HDR1.10@83.34,44.16 HDR1.9@83.34,46.7 ; v1(91.5,13.4) C19.2@91.5,15.75 ; v4(91.8,37.9) 91.8,33.025 87.3,33.025 87.3,15.75 94.6,15.75 v1(94.6,13.4) v1@94.627,13.677 ; 97.5,21.125 v1(101.225,21.125) 101.425,21.325 C25.2@102.85,21.325 ; 97.5,25.125 99.05,25.125 101.3,25.125 v1(101.3,25.7) ; 97.5,27.225 C20.2@102.85,27.225 ; 99.05,32.25 v1(101.325,32.25) ; 99.05,36.4 C5.1@102.55,36.4 ; C36.1@102.65,11.225 101.47,11.225 101.47,12.58 v1(101.225,12.825) ; C32.2@102.85,16.525 pad.0@101.225,16.525 ; v1(103.2,1.325) 103.2,2.85 104.65,2.85 104.65,4.325 130.45,4.325 v1(130.45,1.375) ; v1(105.7,37.075) 105.7,38.3 107.25,38.3 107.25,39.625 ; 107.25,8.375 C37.2@107.25,9.325 ; C28.2@109.75,22.325 v4(112.05,22.325) 112.05,21.2 116.95,21.2 v4(116.95,22.325) C29.2@119.35,22.325 ; 110.125,8.375 110.15,8.4 110.15,9.325 111.6,9.325 v1(111.6,11.025) ; 110.15,39.625 110.15,38.3 111.575,38.3 v1(111.575,37.1) ; RA9.1@111.245,6.15 111.245,8.37 ; v4(112.075,26.5) C23.2@114.6,26.5 ; RA9.2@112.515,6.15 112.515,8.37 ; 113.05,8.375 C39.2@113.05,9.325 ; 113.05,39.625 113.05,38.3 114.55,38.3 v1(114.55,37.173) ; RA9.3@113.785,6.15 113.785,8.37 ; 114.2,39.625 v1(114.2,40.15) ; v1(114.525,11.025) 114.525,9.325 115.95,9.325 115.95,8.375 ; C33.2@114.6,21.2 C23.2@114.6,26.5 ; RA9.4@115.055,6.15 115.055,8.37 ; C9.2@115.95,38.3 115.95,39.625 ; v4(117,26.5) C23.2@114.6,26.5 ; v1(117.4,11.025) 117.4,9.325 118.85,9.325 118.85,8.375 ; v1(117.425,37.1) 117.425,38.3 118.85,38.3 118.85,39.625 ; 121.75,8.375 121.75,9.325 123.475,9.325 v1(123.475,10.8) ; RA10.1@122.245,6.15 122.245,8.37 ; RA10.2@123.515,6.15 123.515,8.37 ; v1(124.75,10.8) 124.75,9.325 126.45,9.325 126.45,8.375 ; RA10.3@124.785,6.15 124.785,8.37 ; RA10.4@126.055,6.15 126.055,8.37 ; C34.1@126.15,18.325 C26.2@126.15,21.225 ; v1(126.15,19.925) 131.25,19.925 ; C21.2@126.157,27.22 127.272,27.219 127.379,27.113 v6(127.725,27.113) ; C12.2@126.45,38.3 124.9,38.3 v1(124.9,37.1) v1(123.3,37.1) 123.3,38.3 121.75,38.3 121.75,39.625 100.05,39.625 98.125,37.7 v1(98.125,36.875) 99.05,36.875 99.05,31.025 97.5,31.025 97.5,16.525 99.05,16.525 pad.0@101.225,16.525 ; v1(127.725,24.725) 128.025,25.025 129.95,25.025 131.25,25.025 ; v6@127.725,27.125 131.25,27.125 ; v1(127.725,31.2) 127.9,31.025 129.95,31.025 131.25,31.025 131.25,17.675 131.7,17.225 131.7,14.775 129.4,14.775 129.4,7.4 132.4,7.4 v1(132.4,7.675) 132.725,7.75 C44.1@135.2,7.75 ; 129.4,8.375 105.6,8.375 v1(105.6,11.225) 105.6,12.8 v1(102.6,12.8) v1(101.225,12.825) ; C35.2@129.95,16.425 131.7,16.425 ; v4(133.6,48.8) 135.65,48.8 JP2.1@135.65,43.96 ; C4.2@134.525,29.05 v1(134.525,30.25) ; v3(141,15.5) v3(141,18.5) ; v3(142.5,15) v3(142.5,19.5) ; v3(144,15.5) 144,24.2 156.7,24.2 160.7,24.2 ; C13.2@156.7,36.7 159.4,36.7 v1(159.4,37.5) 160.7,37.5 160.7,34.6 162.6,34.6 ; R19.2@159.8,16.15 161.8,16.15 v1(161.8,15) ; R14.1@159.8,28.6 162.6,28.6 ; C30.2@160.7,22.1 160.7,24.2 ; 162.55,34.6 162.6,34.6 ; v3(164.15,38.5) 164.9,38.5 v3(164.9,40) ; HDR3.20@164.86,46.5 164.85,48.8 168.4,48.8 168.4,36 170.4,36 170.4,39.3 ; D1.1@169.1,23.777 166.9,23.775 166.9,3.9 169.24,3.9 JP6.2@169.24,2.4 ; 174.1,31.7 170.7,31.7 170.7,33.7 174.1,33.7 ; v1(101.225,12.825) pad.0@101.225,16.525 ; 160.7,24.2 v1(162.6,24.2) 162.6,34.6
  other v1: 131.7,17.125 100.725,38.525
  other v2: 25,6 30,6 35,6 40,6 45,6 50,6 55,6 60,6 65,6 70,6 75,6 20,48.8 25,48.8 30,48.8 35,48.8 40,48.8 45,48.8 50,48.8 55,48.8 60,48.8 65,48.8 70,48.8 75,48.8 80,48.8
  other v3: 142.5,16.5 141,17 144,17 142.5,18 144,18.5 144,20 161.15,38.5 162.65,38.5 161.9,40 163.4,40
HA2: HDR2.2 U1.191 | length 9.9
  Top Layer w0.2: HDR2.2@106.44,46.5 107.85,45.09 107.85,43.525 108.592,42.783 109.591,42.783 110.2,42.174 U1.191@110.2,38.775
HA3: HDR2.3 JP3.2 U1.189 | length 26.9
  Top Layer w0.2: HDR2.3@108.98,43.96 110.95,41.99 v1(110.95,40.925) 111.2,40.625 U1.189@111.2,38.775
  Bottom Layer w0.2: JP3.2@96.233,33.31 96.233,37.883 99.625,41.275 110.6,41.275 v1(110.95,40.925)
HA4: HDR2.4 U1.188 | length 8.9
  Top Layer w0.2: HDR2.4@108.98,46.5 110.25,45.23 110.25,43.304 111.7,41.854 U1.188@111.7,38.775
HA5: HDR2.5 JP4.2 U1.187 | length 36.9
  Top Layer w0.2: HDR2.5@111.52,43.96 111.52,42.6 112.45,41.67 v1(112.45,40.875) 112.2,40.625 U1.187@112.2,38.775
  Bottom Layer w0.2: JP4.2@96.233,24.91 96.233,31.633 97.3,32.7 97.3,33.9 96.633,34.567 96.633,37.718 99.791,40.875 109.55,40.875 110.25,40.175 111.75,40.175 v1(112.45,40.875)
HA6: HDR2.6 U1.181 | length 9.9
  Top Layer w0.2: HDR2.6@111.52,46.5 112.575,45.445 112.575,43.259 113.459,42.375 114.514,42.375 115.2,41.689 U1.181@115.2,38.775
HA7: HDR2.7 U1.179 | length 6.1
  Top Layer w0.2: HDR2.7@114.06,43.96 116.2,41.82 U1.179@116.2,38.775
HA8: HDR2.8 U1.180 | length 9.9
  Top Layer w0.2: HDR2.8@114.06,46.5 112.975,45.415 112.975,43.425 113.625,42.775 114.679,42.775 115.7,41.754 U1.180@115.7,38.775
HA9: HDR2.9 U1.176 | length 5.6
  Top Layer w0.2: HDR2.9@116.6,43.96 117.7,42.86 U1.176@117.7,38.775
HA10: HDR2.10 U1.178 | length 8.8
  Top Layer w0.2: HDR2.10@116.6,46.5 115.3,45.2 115.3,43.4 116.7,42 U1.178@116.7,38.775
HA11: HDR2.11 U1.174 | length 5.4
  Top Layer w0.2: U1.174@118.7,38.775 118.7,42.375 119.14,42.815 HDR2.11@119.14,43.96
HA12: HDR2.12 U1.175 | length 8.4
  Top Layer w0.2: U1.175@118.2,38.775 118.2,43.025 117.85,43.375 117.85,45.21 HDR2.12@119.14,46.5
HA13: HDR2.13 U1.169 | length 5.4
  Top Layer w0.2: U1.169@121.2,38.775 121.2,41.122 121.68,41.602 HDR2.13@121.68,43.96
HA14: HDR2.14 U1.173 | length 8.8
  Top Layer w0.2: U1.173@119.2,38.775 119.2,41.85 120.35,43 120.35,45.17 HDR2.14@121.68,46.5
HA15: HDR2.15 U1.167 | length 6
  Top Layer w0.2: U1.167@122.2,38.775 122.2,40.991 124.22,43.011 HDR2.15@124.22,43.96
HA16: HDR2.16 U1.168 | length 8.8
  Top Layer w0.2: U1.168@121.7,38.775 121.7,41.056 122.775,42.131 122.775,45.055 HDR2.16@124.22,46.5
HA17: HDR2.17 U1.165 | length 6.9
  Top Layer w0.2: U1.165@123.2,38.775 123.2,40.85 126.31,43.96 HDR2.17@126.76,43.96
HA18: HDR2.18 U1.166 | length 9.4
  Top Layer w0.2: U1.166@122.7,38.775 122.7,40.925 125.45,43.675 125.45,45.19 HDR2.18@126.76,46.5
HA19: HDR2.19 U1.164 | length 8.9
  Top Layer w0.2: U1.164@123.7,38.775 123.7,40.784 125.801,42.885 127.26,42.885 128.335,43.96 HDR2.19@129.3,43.96
HARD_TCK: HDR1.3 U1.207 U5.6 | length 75.3
  Top Layer w0.2: U1.207@102.2,38.775 v1(102.2,43.9) ; U5.6@134.85,34 134.85,32.769 136.144,31.475 v1(136.144,31.242)
  Bottom Layer w0.2: HDR1.3@90.96,46.7 90.96,47.46 91.9,48.4 130.934,48.4 133.9,45.434 133.9,42.225 ; v1(102.2,43.9) 102.2,48.4 ; 133.9,42.234 134.125,42.009 134.125,42 138.425,37.7 138.425,33.777 136.144,31.496 v1(136.144,31.242)
HARD_TDI: HDR1.1 U1.159 | length 37.8
  Top Layer w0.2: U1.159@126.2,38.775 126.2,39.95 v1(126.75,40.5)
  Bottom Layer w0.2: HDR1.1@93.5,46.7 95.7,46.7 100.725,41.675 125.575,41.675 v1(126.75,40.5)
HARD_TDO: HDR1.2 U5.17 | length 64.8
  Top Layer w0.2: U5.17@136.15,28.45 v1(136.15,30.05)
  Bottom Layer w0.2: HDR1.2@93.5,44.16 92.2,45.46 92.2,47.6 92.6,48 95.1,48 101.025,42.075 133.484,42.075 134.723,40.837 138.025,37.534 138.025,34.266 135.39,31.631 135.39,30.81 v1(136.15,30.05)
HARD_TMS: HDR1.4 U1.2 U5.5 | length 83.2
  Top Layer w0.2: HDR1.4@90.96,44.16 90.96,42.5 97.335,36.125 U1.2@99.55,36.125 ; U5.5@135.5,34 135.5,32.95 137.081,31.369 v1(137.414,31.369)
  Bottom Layer w0.2: HDR1.4@90.96,44.16 89.85,45.27 89.85,47.25 91.405,48.805 131.095,48.805 134.3,45.6 134.3,42.4 138.825,37.875 138.825,33.415 137.414,32.004 v1(137.414,31.369)
HB2: HDR3.2 U1.163 | length 22.1
  Top Layer w0.2: U1.163@124.2,38.775 124.2,40.719 125.967,42.485 137.054,42.485 140.402,45.833 141.069,46.5 HDR3.2@142,46.5
HB3: HDR3.3 U1.160 | length 22
  Top Layer w0.2: U1.160@125.7,38.775 125.7,40.522 126.464,41.285 137.551,41.285 139.149,42.883 142.933,42.883 144.01,43.96 HDR3.3@144.54,43.96
HB4: HDR3.4 U1.162 | length 24.1
  Top Layer w0.2: U1.162@124.7,38.775 124.7,40.653 126.132,42.085 137.22,42.085 140.559,45.425 143.465,45.425 HDR3.4@144.54,46.5
HB5: HDR3.5 U1.138 | length 32.8
  Top Layer w0.2: U1.138@129.35,27.625 130.616,27.625 132.162,26.079 138.629,26.079 139.25,26.7 139.25,38.634 143.266,42.65 145.77,42.65 HDR3.5@147.08,43.96
HB6: HDR3.6 U1.161 | length 26.1
  Top Layer w0.2: U1.161@125.2,38.775 125.2,40.587 126.298,41.685 137.385,41.685 140.725,45.025 145.605,45.025 HDR3.6@147.08,46.5
HB7: HDR3.7 U1.135 | length 36.2
  Top Layer w0.2: U1.135@129.35,26.125 130.984,26.125 131.909,25.2 139.05,25.2 140.05,26.2 140.05,38.303 143.597,41.85 148.166,41.85 148.825,42.509 148.825,42.525 149.275,42.525 149.62,42.87 HDR3.7@149.62,43.96
HB8: HDR3.8 U1.136 | length 37.9
  Top Layer w0.2: U1.136@129.35,26.625 131.05,26.625 132.075,25.6 138.8,25.6 139.65,26.45 139.65,38.469 143.431,42.25 148,42.25 148.425,42.675 148.425,45.305 HDR3.8@149.62,46.5
HB9: HDR3.9 U1.133 | length 39.4
  Top Layer w0.2: U1.133@129.35,25.125 130.825,25.125 131.55,24.4 139.55,24.4 140.85,25.7 140.85,34.825 140.85,37.972 143.928,41.05 148.497,41.05 149.172,41.725 151.675,41.725 152.16,42.21 HDR3.9@152.16,43.96
HB10: HDR3.10 U1.134 | length 40.7
  Top Layer w0.2: U1.134@129.35,25.625 130.891,25.625 131.716,24.8 139.3,24.8 140.45,25.95 140.45,38.137 143.763,41.45 148.331,41.45 149.006,42.125 150.15,42.125 150.925,42.9 150.925,45.265 HDR3.10@152.16,46.5
HB11: HDR3.11 U1.129 | length 42.5
  Top Layer w0.2: U1.129@129.35,23.125 130.925,23.125 131.305,23.505 139.905,23.505 141.65,25.25 141.65,35.4 141.65,37.64 144.26,40.25 148.828,40.25 149.503,40.925 153.75,40.925 154.7,41.875 HDR3.11@154.7,43.96
HB12: HDR3.12 U1.132 | length 44
  Top Layer w0.2: U1.132@129.35,24.625 130.75,24.625 131.375,24 139.8,24 141.25,25.45 141.25,37.806 144.094,40.65 148.663,40.65 149.338,41.325 152.675,41.325 153.425,42.075 153.425,45.225 HDR3.12@154.7,46.5
HB13: HDR3.13 U1.126 | length 46.7
  Top Layer w0.2: U1.126@129.35,21.625 131.175,21.625 131.875,20.925 138.525,20.925 142.45,24.85 142.45,35.175 142.45,37.309 144.591,39.45 149.16,39.45 149.81,40.1 156.197,40.1 157.24,41.143 HDR3.13@157.24,43.96
HB14: HDR3.14 U1.127 | length 48.3
  Top Layer w0.2: U1.127@129.35,22.125 131.275,22.125 132.075,21.325 138.325,21.325 142.05,25.05 142.05,35.2 142.05,37.475 144.425,39.85 148.994,39.85 149.644,40.5 155.325,40.5 155.925,41.1 155.925,45.185 HDR3.14@157.24,46.5
HB15: HDR3.15 U1.123 | length 48.5
  Top Layer w0.2: U1.123@129.35,20.125 138.925,20.125 143.25,24.45 143.25,36.977 144.923,38.65 149.491,38.65 150.141,39.3 156.529,39.3 159.78,42.551 HDR3.15@159.78,43.96
HB16: HDR3.16 U1.125 | length 50.7
  Top Layer w0.2: U1.125@129.35,21.125 131.075,21.125 131.675,20.525 138.725,20.525 142.85,24.65 142.85,34.7 142.85,37.143 144.757,39.05 149.325,39.05 149.975,39.7 156.363,39.7 158.5,41.837 158.5,45.22 HDR3.16@159.78,46.5
HB17: HDR3.17 U1.121 | length 50.6
  Top Layer w0.2: U1.121@129.35,19.125 139.109,19.125 144.05,24.066 144.05,36.646 145.254,37.85 149.823,37.85 150.448,38.475 156.835,38.475 HDR3.17@162.32,43.96
HB18: HDR3.18 U1.122 | length 52.6
  Top Layer w0.2: U1.122@129.35,19.625 139.044,19.625 143.65,24.231 143.65,36.812 145.088,38.25 149.657,38.25 150.307,38.9 156.694,38.9 161.1,43.306 161.1,45.28 HDR3.18@162.32,46.5
HB19: HDR3.19 U1.120 | length 53.4
  Top Layer w0.2: U1.120@129.35,18.625 139.175,18.625 144.475,23.925 144.475,36.505 145.42,37.45 149.988,37.45 150.613,38.075 157.025,38.075 161.291,42.341 163.241,42.341 HDR3.19@164.86,43.96
I\N\I\T\: R5.2 U1.107 U5.8 | length 32.6
  Top Layer w0.2: U1.107@129.35,12.125 131.5,12.125 v1(131.75,11.875) ; v1(132.575,31.625) 132.575,32.025 133.55,33 U5.8@133.55,34 ; v1(133.803,36.78) R5.2@135.1,36.775
  Bottom Layer w0.2: v1(131.75,11.875) 132.85,12.975 132.85,21.132 132.575,21.407 132.575,35.552 v1(133.803,36.78)
JTAG_NEXUS_TCK: HDR1.7 U1.6 | length 19.8
  Top Layer w0.2: HDR1.7@85.88,46.7 87.15,45.43 87.15,43.875 87.925,43.1 88.575,43.1 97.55,34.125 U1.6@99.55,34.125
JTAG_NEXUS_TDI: HDR1.5 U1.4 | length 17.3
  Top Layer w0.2: HDR1.5@88.42,46.7 89.7,45.42 89.7,43.15 97.725,35.125 U1.4@99.55,35.125
JTAG_NEXUS_TDO: HDR1.6 U1.5 | length 15.3
  Top Layer w0.2: HDR1.6@88.42,44.16 88.42,43.83 97.625,34.625 U1.5@99.55,34.625
JTAG_NEXUS_TMS: HDR1.8 U1.7 | length 18
  Top Layer w0.2: HDR1.8@85.88,44.16 87.34,42.7 88.375,42.7 97.45,33.625 U1.7@99.55,33.625
LCD_CONTRAST: LCD1.3 R1.W | length 21
  Top Layer w0.5: R1.W@5.3,33.8 8.1,33.8 9.2,32.7 20.113,32.7 23.48,36.067 LCD1.3@23.48,37
LCD_DB0: RA2.5 U1.20 | length 68.8
  Top Layer w0.2: RA2.5@35.295,29.925 35.295,27.8 36.12,26.975 45.3,26.975 46.5,25.775 68.41,25.775 71.035,28.4 97.225,28.4 98.5,27.125 U1.20@99.55,27.125
LCD_DB1: RA2.6 U1.18 | length 67.1
  Top Layer w0.2: RA2.6@36.565,29.925 36.565,27.935 37.125,27.375 45.5,27.375 46.7,26.175 68.244,26.175 70.869,28.8 97.391,28.8 98.066,28.125 U1.18@99.55,28.125
LCD_DB2: RA2.7 U1.17 | length 65.5
  Top Layer w0.2: RA2.7@37.835,29.925 37.835,28.165 38.225,27.775 45.7,27.775 46.9,26.575 68.078,26.575 70.703,29.2 97.556,29.2 98.131,28.625 U1.17@99.55,28.625
LCD_DB3: RA2.8 U1.16 | length 63.8
  Top Layer w0.2: RA2.8@39.105,29.925 39.105,28.395 39.325,28.175 45.9,28.175 47.1,26.975 67.913,26.975 70.538,29.6 97.722,29.6 98.197,29.125 U1.16@99.55,29.125
LCD_DB4: RA3.5 U1.15 | length 55.9
  Top Layer w0.2: RA3.5@46.995,29.925 46.995,28.105 47.725,27.375 67.747,27.375 70.372,30 97.888,30 98.263,29.625 U1.15@99.55,29.625
LCD_DB5: RA3.6 U1.11 | length 54.8
  Top Layer w0.2: RA3.6@48.265,29.925 48.265,28.235 48.725,27.775 67.581,27.775 70.206,30.4 97.197,30.4 98.422,31.625 U1.11@99.55,31.625
LCD_DB6: RA3.7 U1.10 | length 53.2
  Top Layer w0.2: RA3.7@49.535,29.925 49.535,28.465 49.825,28.175 67.416,28.175 70.041,30.8 97,30.8 98.325,32.125 U1.10@99.55,32.125
LCD_DB7: RA3.8 U1.9 | length 51.6
  Top Layer w0.2: RA3.8@50.805,29.925 50.805,28.82 51.05,28.575 67.25,28.575 69.875,31.2 96.8,31.2 98.225,32.625 U1.9@99.55,32.625
LCD_DB#0: LCD1.7 RA2.4 RA5.5 | length 9.2
  Top Layer w0.5: LCD1.7@33.64,37 35.295,35.345 RA2.4@35.295,33.075
  Bottom Layer w0.5: LCD1.7@33.64,37 34.895,35.745 RA5.5@34.895,32.975
LCD_DB#1: LCD1.8 RA2.3 RA5.6 | length 8.1
  Top Layer w0.5: LCD1.8@36.18,37 36.18,35.2 36.565,34.815 RA2.3@36.565,33.075
  Bottom Layer w0.5: RA5.6@36.165,32.975 36.165,36.985 LCD1.8@36.18,37
LCD_DB#2: LCD1.9 RA2.2 RA5.7 | length 8.8
  Top Layer w0.5: RA2.2@37.835,33.075 37.835,34.825 38.72,35.71 LCD1.9@38.72,37
  Bottom Layer w0.5: RA5.7@37.435,32.975 37.435,35.715 LCD1.9@38.72,37
LCD_DB#3: LCD1.10 RA2.1 RA5.8 | length 10.6
  Top Layer w0.5: RA2.1@39.105,33.075 39.105,34.845 LCD1.10@41.26,37
  Bottom Layer w0.5: RA5.8@38.705,32.975 38.705,34.505 39.7,35.5 40.9,35.5 41.26,35.86 LCD1.10@41.26,37